# EAGLE board brick_i2c_lcd_mini (EAGLE 7.4.0)
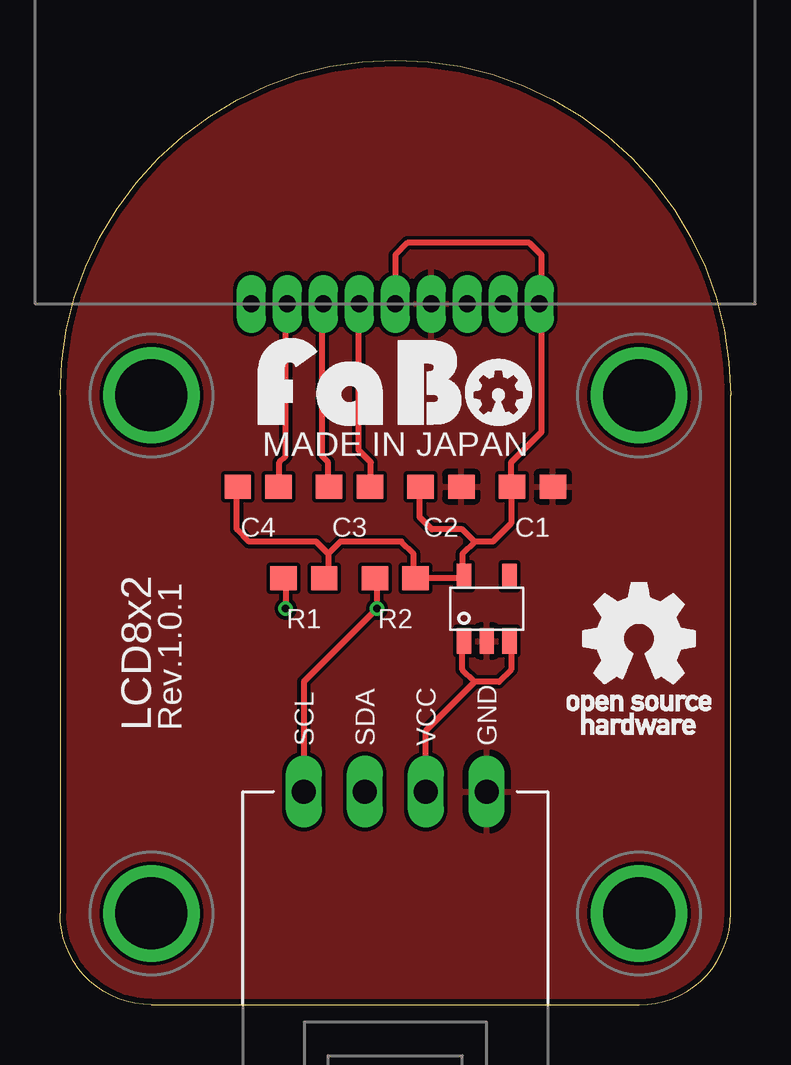
[diagram p0: board, top side]
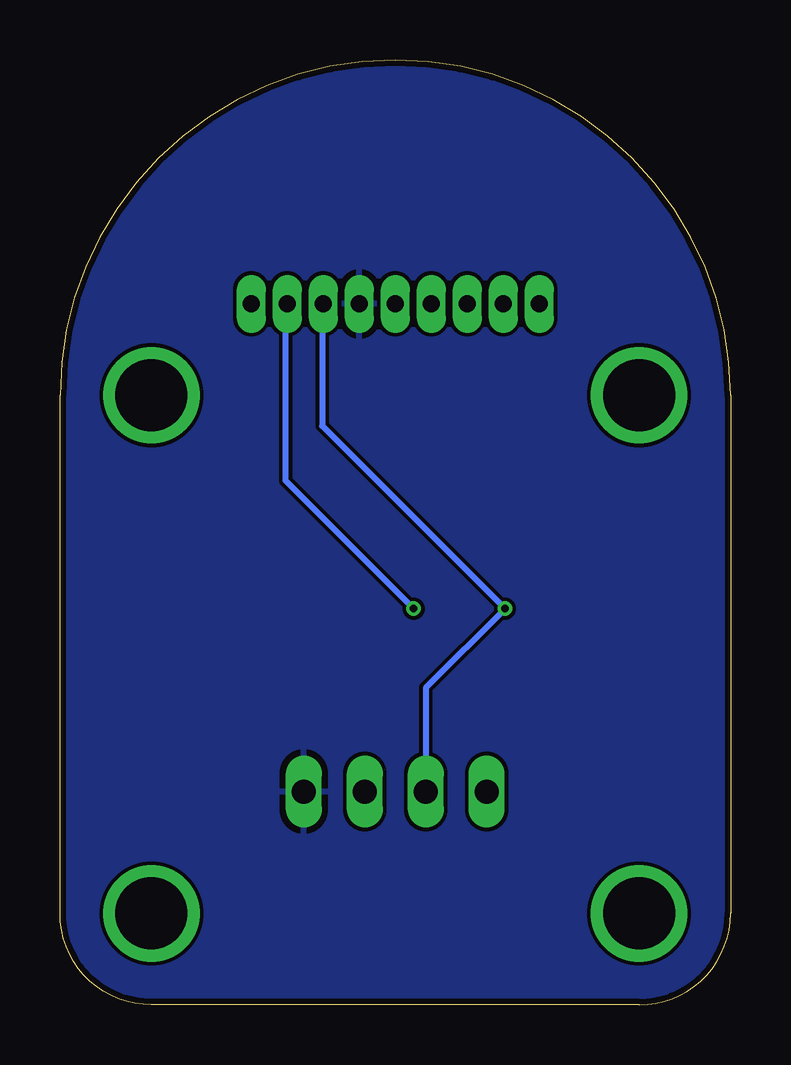
[diagram p1: board, bottom side, seen from below]

Size 27.94 x 39.37 mm. Coordinates in mm from the lower left corner, seen from the top.
Copper layers (1*16): Top 0.035mm / dielectric 1.5mm / Bottom 0.035mm
Design rules "Elecrow_2-layer_eagle_rule": minimum track width 6mil, minimum drill 12mil, track to track 6mil, track to pad 6mil, pad to pad 6mil, via to via 6mil, smd to smd 0mil, copper to edge 10mil, drill to drill 10mil, minimum pad ring 10mil, minimum via ring 6mil, stop-mask expansion 2mil, vias tented up to drill 100mil, thermal gap 10mil
Net classes: 0 default: width 0.203 mm

## Footprints (pad centres in the part's own frame; a part is rotated, then mirrored left to right if it is on the bottom)
EIA0603 = smd 1.1 x 1: 1 -0.85,0; 2 0.85,0
TI-LP2985 = smd 0.6 x 1.05: 1 -0.95,-1.35; 2 0,-1.35; 3 0.95,-1.35; 4 0.95,1.35; 5 -0.95,1.35
FABO_BRICK_I2C = drill 1 long: GND 3.81,-10.16; SCL -3.81,-10.16; SDA -1.27,-10.16; VCC 1.27,-10.16 | drill 3 pad 3.81: P$1 -10.16,6.35; P$2 10.16,6.35; P$3 -10.16,-15.24; P$4 10.16,-15.24
AQM0802A = drill 0.7 pad 1.143 long: 1 -6,0; 2 -4.5,0; 3 -3,0; 4 -1.5,0; 5 0,0; 6 1.5,0; 7 3,0; 8 4.5,0; 9 6,0

## Placement (x,y rotation side)
C1  1uF  [EIA0603]  19.68,21.59 0 top
C2  0.1uF  [EIA0603]  15.88,21.59 0 top
C3  1uF  [EIA0603]  12.06,21.59 0 top
C4  1uF  [EIA0603]  8.26,21.59 0 top
IC1  [TI-LP2985]  17.78,16.51 0 top
J1  [FABO_BRICK_I2C]  13.97,19.05 0 top
R1  4.7k  [EIA0603]  10.16,17.78 0 top
R2  4.7k  [EIA0603]  13.97,17.78 0 top
U1  [AQM0802A]  13.97,29.21 0 top
U$2  [LOGO_OSHW_T_M]  24.13,15.24 0 top
U$3  [LOGO_FABO_M]  13.97,24.13 0 top

## Library data of the parts
C1-C4 R1 R2 U1 U$2 U$3 = FaBo-etc
IC1 = FaBo-Supply
J1 = FaBo-Template

## Nets
3V3: C1.1 C2.1 C4.1 IC1.5 R1.2 R2.2 U1.5 U1.9
5V: IC1.1 IC1.3 J1.VCC
GND: C1.2 C2.2 IC1.2 J1.GND U1.6
N$3: C3.2 U1.4
N$4: C3.1 U1.3
N$5: C4.2 U1.2
SCL: J1.SCL R2.1 U1.8
SDA: J1.SDA R1.1 U1.7

## Tracks (layer width: path | path; a pad name or v marks a point on that pad's centre or on a via)
3V3
  Top 0.254: 17.27,19.3 18.03,19.3 18.8,20.07 18.8,21.59 C1.1 18.84,21.8 18.8,21.84 18.8,22.61 20.07,23.88 20.07,29.11 U1.9 19.97,29.37 20.07,29.46 20.07,31.24 19.56,31.75 14.48,31.75 13.97,31.24 U1.5 | 17.27,19.3 16.76,18.8 16.76,17.93 | 16.76,17.93 IC1.5 | 17.27,19.3 16.76,19.81 15.49,19.81 14.99,20.32 14.99,21.55 C2.1 | 16.76,17.93 16.76,17.78 R2.2 14.82,17.95 14.73,18.03 14.73,18.8 14.22,19.3 11.68,19.3 11.18,18.8 | 11.18,18.8 11.18,17.95 R1.2 | 11.18,18.8 10.67,19.3 7.87,19.3 7.37,19.81 7.37,21.55 C4.1
5V
  Top 0.254: IC1.3 18.73,15.05 18.8,14.99 18.8,13.97 18.29,13.46 17.27,13.46 | 17.27,13.46 16.76,13.97 16.76,15.09 IC1.1 | J1.VCC 15.24,11.43 17.27,13.46
GND
  pour Bottom: -1.27,-1.27 29.21,-1.27 29.21,40.64 -1.27,40.64
  pour Top: -1.27,-1.27 29.21,-1.27 29.21,40.64 -1.27,40.64
N$3
  Top 0.254: C3.2 12.91,21.8 12.95,21.84 12.95,22.61 12.45,23.11 12.45,29.19 U1.4
N$4
  Top 0.254: C3.1 11.18,21.59 11.18,22.61 10.92,22.86 10.92,29.16 U1.3
N$5
  Top 0.254: C4.2 9.14,21.59 9.14,22.61 9.4,22.86 9.4,29.14 U1.2
SCL  (via drill 0.3)
  Top 0.254: J1.SCL 10.16,13.46 v13.21,16.51 13.21,17.53 13.12,17.61 R2.1
  Bottom 0.254: v13.21,16.51 18.54,21.84 18.54,29.14 U1.8
SDA  (via drill 0.3)
  Top 0.254: R1.1 9.31,17.61 9.4,17.53 v9.4,16.51
  Bottom 0.254: J1.SDA 12.7,13.21 v9.4,16.51 17.02,24.13 17.02,28.96 U1.7

## Text on the board
tPlace: MADE IN JAPAN | LCD8x2 | Rev.1.0.1